# Altium PCB PCB1.PcbDoc (part 2 of 2)
Units mm, origin at the board's own origin, x right, y up, seen from the top; angles counter-clockwise.
Board outline 100 x 90 mm, 2 copper layers (Top Layer, Bottom Layer); 112 components, 100 nets, 469 pads, 191 vias.
Unrouted connection lines stored in the file: 2.
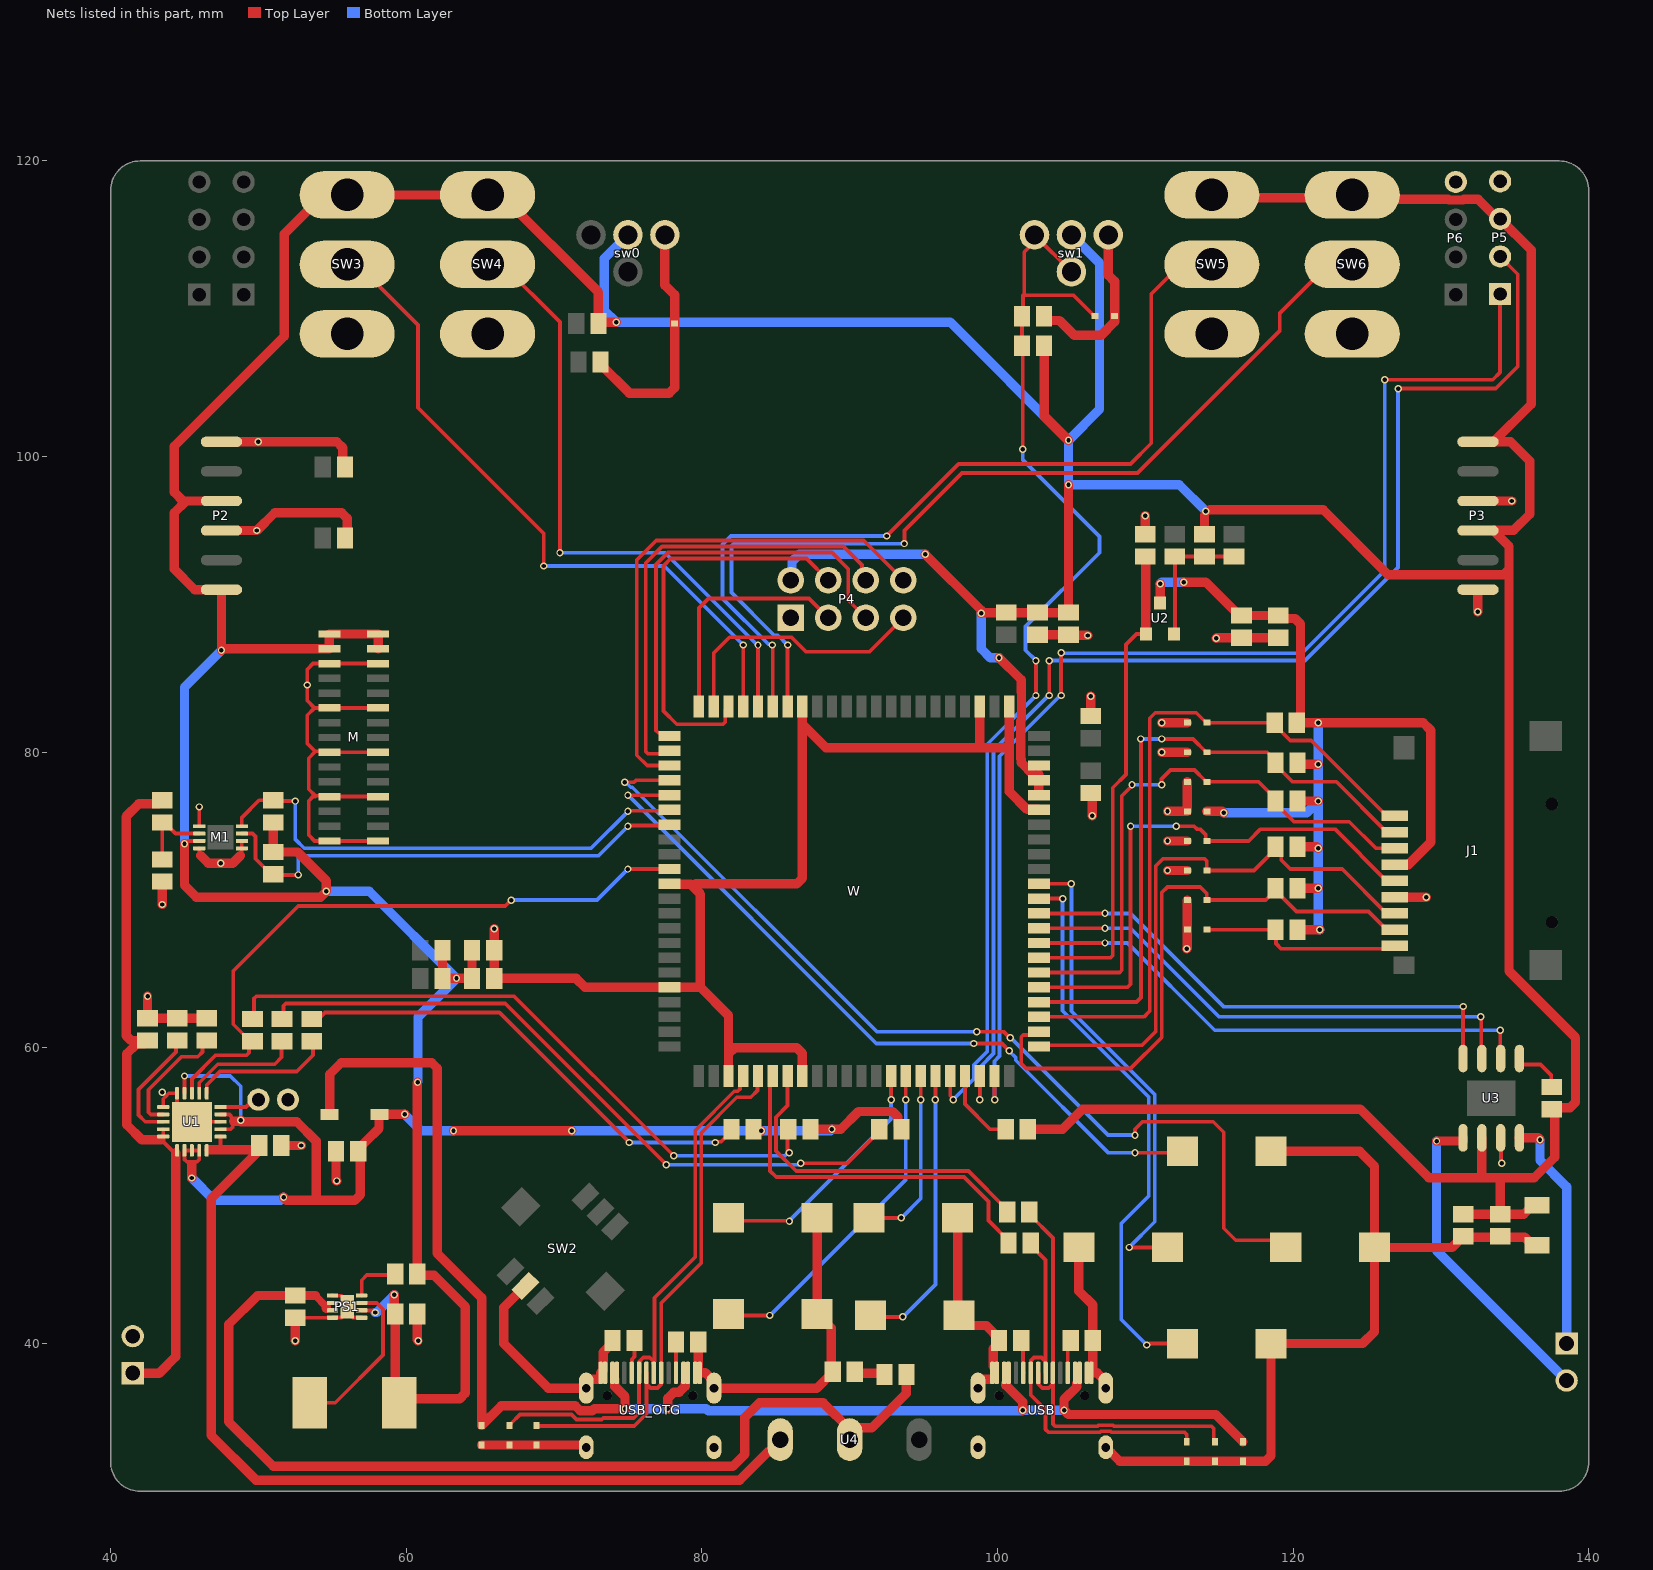
[diagram p2: the nets of this part, all layers, seen from the top]

## Via types
v1: diameter 0.5, hole 0.3, Top Layer to Bottom Layer, tented both sides, 187 vias
v2: diameter 3, hole 3, Top Layer to Bottom Layer, tented both sides, 4 vias

## Nets (pads, with @x,y where several pads share a name; then routed paths per layer and width w, separated by ;. In a path a pad name is that pad's centre, name@x,y a point inside that pad or via, vN(x,y) a via of type N, cw(c..) or ccw(c..) an arc to the next point about the centre after c; other vN are vias at no path point) (continued)
GND: C1.1 C2.1 C3.1 C4.1 C5.1 C6.2 C7.1 C8.1 C9.1 C10.1 C11.2 C12.1 C13.1 C14.2 C15.1 C16.1 C17.1 C18.1 C19.2 C20.2 C21.2 D1.2 D2.2 D3.2 D4.1 D5.1 D7.2 D8.2 D9.2 D13.2 D14.1 D15.1 D16.1 D17.1 D18.1 D19.1 D20.1 D21.1 J1.6 KEY1.2 KEY2.2 KEY3.2 KEY4.2 KEY5.2 KEY6.2 KEY7.2 KEY8.2 M1.1 M1.4 M1.5 M1.6 M.3 M.6 M.9 M.12 M.15 P1.2 P2.3 P2.6 P3.3 P3.6 P4.1 P5.4 P6.4 PS1.1 PS1.4 PS1.5 PS1.9 R3.1 R5.1 R9.1 R12.1 R16.2 R17.2 R25.1 RT1.2 sw0.1 sw1.1 SW2.2 SW3.3 SW4.3 SW5.3 SW6.3 U1.3 U1.10 U1.11 U1.21 U3.7 USB.1 USB.2 USB.3 USB.4 USB.A1 USB.A12 USB.B1 USB.B12 USB_OTG.1 USB_OTG.2 USB_OTG.3 USB_OTG.4 USB_OTG.A1 USB_OTG.A12 USB_OTG.B1 USB_OTG.B12 W.1 W.3 W.15 W.33 W.40 W.47 W.52 W.83 | length 360.6
  Top Layer w0.254: v1(43.5,57) 43.75,56.75 ; U1.11@43.565,56 43.565,56.565 43.75,56.75 ; M1.4@46,73.5 46,73.107 46.093,73.015 ; M1.1@46,75 v1(46,76.3) ; U1.3@47.435,55 U1.21@45.5,55 44.5,56 U1.10@44.5,56.935 43.935,56.935 43.75,56.75 ; 48.787,73.015 48.88,73.107 M1.5@48.88,73.5 M1.6@48.88,74 ; C13.1@52.5,41.75 PS1.4@55.015,41.75 55.028,41.763 55.613,41.763 PS1.9@56,42.15 ; 53.8,80 53.4,79.6 53.4,77.5 53.835,77.065 54.235,77.065 54.3,77 M.12@54.8,77 M.12@58.1,77 ; 53.835,77 53.7,77 53.4,76.7 53.4,74.4 53.8,74 M.15@58.1,74 ; PS1.1@55.015,43.25 55.028,43.237 55.613,43.237 56,42.85 PS1.9@56,42.5 PS1.9@56,42.15 ; PS1.5@56.985,41.75 56.972,41.763 56.387,41.763 PS1.9@56,42.15 ; M.9@58.1,80 M.9@54.8,80 54.3,80 54.235,80.065 53.835,80.065 53.3,80.6 53.3,82.5 53.8,83 ; M.6@58.1,83 M.6@54.8,83 53.8,83 ; M.3@58.1,86 M.3@54.8,86 53.7,86 53.3,85.6 53.3,83.5 53.8,83 ; U3.7@134.035,53.918 134.067,53.885 134.067,52.233 v1(134.1,52.2)
  Top Layer w0.635: v1(42.5,63.5) C14.2@42.5,62 R16.2@44.5,62 R17.2@46.5,62 ; v1(43.5,69.7) C6.2@43.5,71.25 ; 46.093,73.015 46.607,72.5 v1(47.44,72.5) 48.273,72.5 48.787,73.015 ; P2.3@47.5,95 v1(49.9,95) 51.1,96.2 55.628,96.2 56,95.828 56,94.65 C8.1@55.85,94.5 ; P2.6@47.5,101 v1(50,101) 55.3,101 55.717,100.583 55.717,99.532 C7.1@55.95,99.3 ; C11.2@51.55,53.4 v1(52.9,53.4) ; v1(52.5,40.2) C13.1@52.5,41.75 ; C5.1@55.25,53 55.25,51.05 v1(55.3,51) ; C12.1@60.75,42 60.75,40.25 v1(60.8,40.2) ; D1.2@65.1,33.14 D2.2@67,33.14 D3.2@68.8,33.14 72.015,33.14 USB_OTG.2@72.175,32.98 ; v1(65.95,68.067) C18.1@65.95,64.7 71.491,64.7 72.091,64.1 W.40@77.8,64.1 79.9,64.1 ; SW2.2@68.052,43.892 66.6,42.44 66.6,40 69.62,36.98 USB_OTG.3@72.175,36.98 72.175,37.419 72.344,37.587 72.982,37.587 73.15,37.755 USB_OTG.A1@73.15,38.02 73.317,38.187 73.317,39.418 73.95,40.05 R3.1@73.95,40.2 ; C3.1@73.15,106.4 73.15,106.25 75.1,104.3 77.788,104.3 78.16,104.672 D4.1@78.16,109 78.16,110.94 77.5,111.6 sw0.1@77.5,115 ; W.33@77.8,71.1 77.833,71.067 79.238,71.067 79.403,70.903 ; R5.1@79.75,40.1 79.75,38.12 USB_OTG.A12@79.85,38.02 80.236,38.02 80.825,37.431 USB_OTG.4@80.825,36.98 87.78,36.98 88.75,37.95 88.75,41.05 88.532,41.268 88.532,41.318 87.85,42 KEY1.2@87.8,42 KEY3.2@87.8,48.5 ; W.47@81.8,58.1 81.8,59.6 ; W.52@86.8,58.1 86.8,59.628 86.428,60 82.2,60 81.8,59.6 ; W.15@86.8,83.1 86.8,81.9 ; KEY4.2@97.3,48.5 97.3,42 KEY2.2@97.4,41.9 98.082,41.218 99.232,41.218 100.1,40.35 R9.1@100.1,40.2 100.1,40.05 99.7,39.65 USB.A1@99.7,38.453 ; USB.3@98.675,36.98 98.675,37.419 98.844,37.587 99.482,37.587 ; W.3@98.8,83.1 98.8,80.4 98.9,80.3 ; W.1@100.8,83.1 100.793,83.093 100.793,80.3 ; C1.1@102.7,87.95 C2.1@104.8,87.95 104.831,87.919 106.081,87.919 v1(106.1,87.9) ; W.83@102.8,76.1 102.767,76.133 102.003,76.133 100.793,77.343 100.793,80.229 100.793,80.3 ; C4.1@103.15,109.5 103.15,109.444 103.383,109.211 104.189,109.211 105.2,108.2 107,108.2 107.92,109.12 D5.1@107.92,109.5 107.92,111.855 107.5,112.275 sw1.1@107.5,115 ; KEY6.2@105.5,46.5 105.5,43.559 106.45,42.609 R12.1@106.45,40.2 106.45,38.12 USB.A12@106.35,38.02 106.736,38.02 107.325,37.431 USB.4@107.325,36.98 ; C10.1@106.3,77.25 106.4,77.15 v1(106.4,75.7) ; C9.1@106.3,82.45 v1(106.3,83.8) ; USB.1@107.325,32.98 107.325,32.779 107.494,32.61 107.695,32.61 108.265,32.04 D8.2@112.8,32.04 D9.2@114.7,32.04 D7.2@116.6,32.04 118.128,32.04 118.5,32.412 KEY8.2@118.5,40 124.7,40 125.5,40.8 KEY7.2@125.5,46.5 ; R25.1@110,94.75 v1(110,96) ; v1(111.1,80) D15.1@112.84,80 ; v1(111.1,82) D14.1@112.84,82 ; v1(111.5,72) D19.1@112.84,72 ; v1(111.5,74) D18.1@112.84,74 ; v1(111.5,76) D17.1@112.84,76 D16.1@112.84,78 ; v1(112.8,66.7) 112.84,66.74 D21.1@112.84,68 D20.1@112.84,70 ; v1(114.8,87.7) 114.85,87.75 C15.1@116.5,87.75 C16.1@119,87.75 ; KEY5.2@118.5,53 124.5,53 125.5,52 KEY7.2@125.5,46.5 ; J1.6@126.873,70.2 v1(129,70.2) ; C21.2@131.5,47.2 135.65,47.2 136.2,46.65 C19.2@136.5,46.65 ; C21.2@131.5,47.25 131.35,47.25 131.118,47.017 131.118,46.872 130.746,46.5 KEY7.2@125.5,46.5 ; v1(132.5,89.5) P3.6@132.5,91 ; P3.3@132.5,97 v1(134.8,97) ; 79.403,70.903 79.6,71.1 86.428,71.1 86.8,71.472 86.8,81.9 ; 79.403,70.903 79.9,70.406 79.9,64.1 ; 79.9,64.1 81.8,62.2 81.8,59.6 ; 86.8,81.9 88.4,80.3 98.9,80.3 ; 98.9,80.3 100.793,80.3
  other v1: 53.3,84.55
KEY_A: KEY7.1 W.26 | length 65.9
  Top Layer w0.254: v1(74.776,77.976) 75.409,77.976 75.534,78.1 W.26@77.8,78.1 ; v1(98.6,61.1) 100.405,61.1 100.805,60.7 v1(100.872,60.7) ; v1(109.3,54.1) 109.3,54.5 109.8,55 114.6,55 115.3,54.3 115.3,47.8 116.118,46.982 119.018,46.982 KEY7.1@119.5,46.5 KEY7.1@119.3,46.3
  Bottom Layer w0.254: v1(74.776,77.976) 74.842,77.976 75.188,77.629 75.296,77.629 91.825,61.1 v1(98.6,61.1) ; v1(100.872,60.7) 107.472,54.1 v1(109.3,54.1)
KEY_B: KEY5.1 W.27 | length 50.5
  Top Layer w0.254: v1(75,77.1) W.27@77.8,77.1 ; v1(98.4,60.3) 100.3,60.3 v1(100.8,59.8) ; v1(109.3,52.9) 112.4,52.9 KEY5.1@112.5,53
  Bottom Layer w0.254: v1(75,77.1) 91.8,60.3 v1(98.4,60.3) ; v1(100.8,59.8) 100.8,59.78 101.236,59.344 101.236,59.164 107.5,52.9 v1(109.3,52.9)
KEY_MENU: KEY4.1 W.60 | length 12.3
  Top Layer w0.254: KEY4.1@91.3,48.5 v1(93.5,48.5) ; v1(94.8,56.5) W.60@94.8,58.1
  Bottom Layer w0.254: v1(93.5,48.5) 94.8,49.8 v1(94.8,56.5)
KEY_OPTION: KEY3.1 W.58 | length 16.9
  Top Layer w0.254: KEY3.1@81.8,48.5 82,48.3 85.9,48.3 v1(85.924,48.276) ; v1(92.8,56.5) W.58@92.8,58.1
  Bottom Layer w0.254: v1(85.924,48.276) 85.924,48.324 92.8,55.2 v1(92.8,56.5)
KEY_SELECT: KEY1.1 W.59 | length 22.9
  Top Layer w0.254: KEY1.1@81.8,42 81.9,41.9 v1(84.6,41.9) ; v1(93.8,56.5) W.59@93.8,58.1
  Bottom Layer w0.254: v1(84.6,41.9) 93.8,51.1 v1(93.8,56.5)
KEY_START: KEY2.1 W.61 | length 19.5
  Top Layer w0.254: KEY2.1@91.4,41.9 91.5,41.8 v1(93.6,41.8) ; v1(95.8,56.5) W.61@95.8,58.1
  Bottom Layer w0.254: v1(93.6,41.8) 95.8,44 v1(95.8,56.5)
KEY_X: KEY6.1 W.78 | length 32.5
  Top Layer w0.254: W.78@102.8,71.1 v1(105,71.1) ; v1(108.9,46.5) KEY6.1@111.5,46.5
  Bottom Layer w0.254: v1(105,71.1) 105,62.486 110.636,56.85 110.636,48.236 v1(108.9,46.5)
KEY_Y: KEY8.1 W.77 | length 38.1
  Top Layer w0.254: W.77@102.8,70.1 v1(104.4,70.1) ; v1(110.1,39.9) 110.167,39.9 110.267,40 KEY8.1@112.5,40
  Bottom Layer w0.254: v1(104.4,70.1) 104.4,62.511 110.229,56.682 110.229,49.973 108.371,48.114 108.371,41.629 v1(110.1,39.9)
MAX_SCL: M1.7 R11.1 W.29 | length 33
  Top Layer w0.254: M1.7@48.88,74.5 49.6,74.5 49.8,74.3 49.8,72.8 50.85,71.75 R11.1@51,71.75 51.05,71.7 v1(52.7,71.7) ; v1(75,75) 75.047,75.047 77.747,75.047 W.29@77.8,75.1
  Bottom Layer w0.254: v1(52.7,71.7) 52.7,72.851 52.849,73 73,73 v1(75,75)
MAX_SDA: M1.8 R8.1 W.28 | length 33.9
  Top Layer w0.254: M1.8@48.88,75 48.88,75.58 50.05,76.75 R8.1@51,76.75 51.05,76.7 v1(52.5,76.7) ; v1(75,76) 75.047,76.047 77.747,76.047 W.28@77.8,76.1
  Bottom Layer w0.254: v1(52.5,76.7) 52.5,74.1 53.1,73.5 72.5,73.5 v1(75,76)
NetC6_1: C6.1 M1.2 R10.2 | length 5.3
  Top Layer w0.254: C6.1@43.5,72.75 R10.2@43.5,75.25 43.65,75.25 44.4,74.5 M1.2@46,74.5
NetD10_2: D10.2 R13.1 | length 32.6
  Top Layer w0.254: R13.1@53.8,61.7 54.5,62.4 66.3,62.4 v1(75.1,53.6) ; v1(80.9,53.6) 80.947,53.647 81.297,53.647 82,54.35 D10.2@82,54.5
  Bottom Layer w0.254: v1(75.1,53.6) v1(80.9,53.6)
NetD11_2: D11.2 R15.1 | length 43.9
  Top Layer w0.254: R15.1@49.7,61.897 49.7,63.351 49.849,63.5 67.3,63.5 v1(78.1,52.7) ; D11.2@85.85,54.5 85.8,54.45 85.8,53.067 85.9,52.967 v1(85.9,52.9)
  Bottom Layer w0.254: v1(78.1,52.7) 85.633,52.7 85.833,52.9 v1(85.9,52.9)
NetD12_2: D12.2 R18.1 | length 47.1
  Top Layer w0.254: R18.1@51.7,61.735 51.7,62.851 51.849,63 66.7,63 v1(77.6,52.1) ; v1(86.7,52.2) 89.85,52.2 92,54.35 D12.2@92,54.5
  Bottom Layer w0.254: v1(77.6,52.1) 86.533,52.1 86.633,52.2 v1(86.7,52.2)
NetD13_1: D13.1 R33.2 | length 2.2
  Top Layer w0.635: D13.1@90.25,38.1 90.35,38 92.25,38 R33.2@92.35,37.9
NetD21_2: D21.2 J1.9 R24.2 | length 13.9
  Top Layer w0.254: D21.2@114.16,68 R24.2@118.8,68 118.832,67.968 118.832,67.068 119.2,66.7 126.673,66.7 J1.9@126.873,66.9
NetL1_1: L1.1 PS1.7 | length 11
  Top Layer w0.254: L1.1@53.475,36 55.2,36 58.421,39.221 58.421,42.319 58.003,42.737 56.998,42.737 PS1.7@56.985,42.75
NetPS1_8: PS1.8 R14.2 | length 3.1
  Top Layer w0.254: PS1.8@56.985,43.25 56.985,44.285 57.332,44.632 58.827,44.632 58.895,44.7 R14.2@58.928,44.7
NetR3_2: R3.2 USB_OTG.A5 | length 2.3
  Top Layer w0.254: USB_OTG.A5@75.25,38.02 75.273,38.043 75.273,38.942 75.45,39.119 R3.2@75.45,40.2
NetR4_1: R4.1 W.63 | length 5.4
  Top Layer w0.254: W.63@97.8,58.1 97.8,56.2 99.5,54.5 R4.1@100.55,54.5
NetR5_2: R5.2 USB_OTG.B5 | length 2.1
  Top Layer w0.254: USB_OTG.B5@78.25,38.02 R5.2@78.25,40.1
NetR6_2: R6.2 W.51 | length 22.8
  Top Layer w0.254: W.51@85.8,58.1 85.8,56.095 85.021,55.316 85.021,53.031 86.381,51.671 98.029,51.671 100.65,49.05 R6.2@100.65,48.9
NetR7_2: R7.2 W.50 | length 25.5
  Top Layer w0.254: W.50@84.8,58.1 84.614,57.914 84.614,51.68 85.03,51.264 97.736,51.264 99.386,49.614 99.386,48.314 100.75,46.95 R7.2@100.75,46.8
NetR9_2: R9.2 USB.A5 | length 2.2
  Top Layer w0.254: R9.2@101.6,40.2 101.727,40.073 101.727,38.043 USB.A5@101.75,38.02
NetR12_2: R12.2 USB.B5 | length 2.4
  Top Layer w0.254: USB.B5@104.75,38.02 104.75,39.55 105.25,40.05 R12.2@105.25,40.2
NetR13_2: R13.2 U1.6 | length 9.3
  Top Layer w0.254: U1.6@46.5,56.935 46.5,57.5 47.4,58.4 52.6,58.4 53.7,59.5 R13.2@53.7,60.2
NetR16_1: R16.1 U1.13 | length 8
  Top Layer w0.254: U1.13@43.565,55 43.562,55.003 42.349,55.003 41.896,55.456 41.896,57.196 44.418,59.718 44.418,60.418 R16.1@44.5,60.5
NetR17_1: R17.1 U1.12 | length 8.2
  Top Layer w0.254: U1.12@43.565,55.5 42.711,55.5 42.563,55.649 42.563,57.163 44.8,59.4 45.9,59.4 46.218,59.718 46.218,60.218 R17.1@46.5,60.5
NetR18_2: R18.2 U1.7 | length 8.1
  Top Layer w0.254: U1.7@46,56.935 46,57.649 47.251,58.9 51.1,58.9 51.568,59.368 51.568,60.418 R18.2@51.6,60.45
NetR26_1: R26.1 R31.1 R32.1 U2.2 | length 9.3
  Top Layer w0.254: U2.2@111.95,88 112,88.05 R31.1@112,93.25 R32.1@114,93.25 R26.1@116,93.25
NetR27_2: R27.2 U3.1 | length 3.6
  Top Layer w0.254: U3.1@135.305,59.282 135.305,59.046 135.479,58.873 136.727,58.873 137.468,58.132 137.468,57.382 R27.2@137.5,57.35
NetRT1_1: RT1.1 U1.5 | length 2.8
  Top Layer w0.254: U1.5@47.435,56 49.163,56 49.663,56.5 RT1.1@50,56.5
NRF_CE: P4.3 W.22 | length 16.2
  Top Layer w0.254: W.22@79.8,83.1 79.8,89.751 80.449,90.4 87.247,90.4 P4.3@88.55,89.097
NRF_CLK: P4.5 W.23 | length 29.9
  Top Layer w0.254: W.23@77.8,81.1 77.577,81.323 77.049,81.323 76.9,81.472 76.9,92.7 77.706,93.506 88.794,93.506 89.9,92.4 89.9,90.287 P4.5@91.09,89.097
NRF_CS: P4.4 W.20 | length 27.5
  Top Layer w0.254: W.20@81.8,83.1 81.577,82.877 81.577,82.049 81.428,81.9 78.3,81.9 77.4,82.8 77.4,92.6 77.9,93.1 87.087,93.1 P4.4@88.55,91.637
NRF_IRQ: P4.8 W.25 | length 35.4
  Top Layer w0.254: W.25@77.8,79.1 76.3,79.1 75.6,79.8 75.6,93 76.919,94.319 90.948,94.319 P4.8@93.63,91.637
NRF_MISO: P4.7 W.21 | length 18.2
  Top Layer w0.254: W.21@80.8,83.1 80.8,86.707 81.878,87.784 86.061,87.784 87.043,86.803 91.337,86.803 P4.7@93.63,89.097
NRF_MOSI: P4.6 W.24 | length 31.2
  Top Layer w0.254: W.24@77.8,80.1 77.6,79.9 76.349,79.9 76.2,80.049 76.2,92.8 77.313,93.913 89.587,93.913 90.825,92.675 90.825,91.903 P4.6@91.09,91.637
NS_BCLK: U3.3 W.75 | length 35.2
  Top Layer w0.254: W.75@102.8,68.1 v1(107.271,68.1) ; v1(132.7,62.1) 132.732,62.068 132.732,59.315 U3.3@132.765,59.282
  Bottom Layer w0.254: v1(107.271,68.1) 109,68.1 115,62.1 v1(132.7,62.1)
NS_LRCLK: U3.2 W.74 | length 35.6
  Top Layer w0.254: W.74@102.8,67.1 v1(107.271,67.1) ; v1(134,61.2) 134.017,61.183 134.017,59.3 U3.2@134.035,59.282
  Bottom Layer w0.254: v1(107.271,67.1) 108.8,67.1 114.7,61.2 v1(134,61.2)
NS_SDATA: U3.4 W.76 | length 34.8
  Top Layer w0.254: W.76@102.8,69.1 v1(107.271,69.1) ; U3.4@131.495,59.282 131.497,59.285 131.497,62.797 v1(131.5,62.8)
  Bottom Layer w0.254: v1(107.271,69.1) 109,69.1 115.323,62.777 131.477,62.777 v1(131.5,62.8)
P4_BOOT: C4.2 D5.2 R2.1 sw1.2 sw1.3 W.62 | length 76.4
  Top Layer w0.254: W.62@96.8,58.1 96.8,56.767 97,56.567 v1(97,56.5) ; v1(101.7,100.5) 101.7,107.45 R2.1@101.65,107.5 C4.2@101.65,109.5 101.732,109.582 101.732,110.917 ; v1(102.6,83.841) v1(102.6,86.2) ; sw1.3@105,112.5 sw1.2@102.5,115 102.5,114.528 101.805,113.833 101.805,110.99 101.732,110.917 ; D5.2@106.6,109.5 106.56,109.5 105.143,110.917 101.732,110.917
  Bottom Layer w0.254: v1(97,56.5) 98.394,57.894 98.394,58.845 99.3,59.751 99.3,80.541 v1(102.6,83.841) ; v1(101.7,100.5) 101.7,99.8 106.9,94.6 106.9,93.5 101.9,88.5 101.9,86.9 v1(102.6,86.2)
P4_UART_RX: P5.1 W.65 | length 84.2
  Top Layer w0.254: v1(99.8,56.5) W.65@99.8,58.1 ; v1(104.3,83.841) v1(104.3,86.729) ; v1(126.2,105.2) 133.5,105.2 134,105.7 P5.1@134,111
  Bottom Layer w0.254: v1(99.8,56.5) 99.8,59.102 100.142,59.444 100.142,79.735 104.249,83.841 v1(104.3,83.841) ; v1(104.3,86.729) 104.329,86.7 120.6,86.7 126.2,92.3 v1(126.2,105.2)
P4_UART_TX: P5.2 W.64 | length 88.2
  Top Layer w0.254: v1(98.8,56.5) W.64@98.8,58.1 ; v1(103.5,83.841) v1(103.5,86.2) ; v1(127.1,104.6) 133.7,104.6 135.2,106.1 135.2,112.34 P5.2@134,113.54
  Bottom Layer w0.254: v1(98.8,56.5) 98.8,58.677 99.736,59.612 99.736,80.136 103.441,83.841 v1(103.5,83.841) ; v1(103.5,86.2) 120.8,86.2 127.1,92.5 v1(127.1,104.6)
POW_STATUS: R15.2 U1.8 W.32 | length 44.2
  Top Layer w0.254: U1.8@45.5,56.935 45.503,56.938 45.503,57.903 47.1,59.5 49.2,59.5 49.368,59.668 49.368,60.218 R15.2@49.6,60.45 49.45,60.45 48.3,61.6 48.3,65.2 52.7,69.6 66.7,69.6 v1(67.1,70) ; v1(75,72.1) W.32@77.8,72.1
  Bottom Layer w0.254: v1(67.1,70) 72.9,70 v1(75,72.1)
SD_CLK: D18.2 J1.5 W.71 | length 37.3
  Top Layer w0.254: W.71@102.8,64.1 108.8,64.1 109,64.3 v1(109,75) ; v1(112.1,75) 113.289,75 113.489,74.8 113.7,74.8 114.095,74.405 114.095,74.065 D18.2@114.16,74 117,74 117.8,74.8 122.823,74.8 126.323,71.3 J1.5@126.873,71.3
  Bottom Layer w0.254: v1(109,75) v1(112.1,75)
SD_CMD: D16.2 J1.3 R21.2 W.72 | length 39.3
  Top Layer w0.254: W.72@102.8,65.1 108.251,65.1 108.4,65.249 108.4,77.033 109.1,77.733 v1(109.1,77.8) ; v1(111.1,77.8) 111.1,78.2 111.7,78.8 113.32,78.8 114.047,78.073 114.087,78.073 D16.2@114.16,78 117.65,78 118.8,76.85 R21.2@118.8,76.7 118.8,76.55 120.05,75.3 123.8,75.3 125.6,73.5 J1.3@126.873,73.5
  Bottom Layer w0.254: v1(109.1,77.8) v1(111.1,77.8)
SD_D0: D19.2 J1.7 R22.2 W.67 | length 39.4
  Top Layer w0.254: W.67@102.8,60.1 102.882,60.182 109.782,60.182 110.706,61.106 110.706,72.306 111.2,72.8 114,72.8 114.16,72.64 D19.2@114.16,72 117.35,72 R22.2@118.8,73.45 ; R22.2@118.8,73.6 R22.2@118.8,73.45 ; J1.7@126.873,69.1 126.323,69.1 123.323,72.1 119.8,72.1 119.19,72.71 119.19,73.06 R22.2@118.8,73.45
SD_D1: D20.2 J1.8 R23.2 W.68 | length 41.5
  Top Layer w0.254: W.68@102.8,61.1 102.577,60.877 101.749,60.877 101.6,60.728 101.6,58.949 101.949,58.6 109,58.6 111.113,60.713 111.113,70.513 111.489,70.889 113.711,70.889 114.16,70.44 D20.2@114.16,70 118.15,70 R23.2@118.8,70.65 ; R23.2@118.8,70.8 R23.2@118.8,70.65 ; J1.8@126.873,68 126.323,68 125.098,69.225 120.225,69.225 R23.2@118.8,70.65
SD_D2: D14.2 J1.1 R19.2 W.69 | length 47.2
  Top Layer w0.254: W.69@102.8,62.1 109.9,62.1 110.3,62.5 110.3,82.3 110.671,82.671 113.449,82.671 114.12,82 R19.2@118.75,82 118.75,81.85 119.8,80.8 121.223,80.8 126.323,75.7 J1.1@126.873,75.7
SD_D3: D15.2 J1.2 R20.2 W.70 | length 44.5
  Top Layer w0.254: W.70@102.8,63.1 109.4,63.1 109.7,63.4 v1(109.7,80.9) ; v1(111.1,80.9) 113.22,80.9 114.12,80 118.25,80 118.8,79.45 R20.2@118.8,79.3 118.8,79.15 119.95,78 122.923,78 126.323,74.6 J1.2@126.873,74.6
  Bottom Layer w0.254: v1(109.7,80.9) v1(111.1,80.9)
SD_PWR: R25.2 U2.1 W.73 | length 33.4
  Top Layer w0.254: W.73@102.8,66.1 107.651,66.1 107.8,66.249 107.8,77.6 108.7,78.5 108.7,87.3 109.4,88 U2.1@110.05,88
  Top Layer w0.635: R25.2@110,93.25 110.025,93.225 110.025,88.025 U2.1@110.05,88
SD_VDD: C15.2 C16.2 D17.2 J1.4 R19.1 R20.1 R21.1 R22.1 R23.1 R24.1 U2.3 | length 67.8
  Top Layer w0.635: U2.3@111,90.1 v1(111,91.4) ; v1(112.6,91.5) 114.1,91.5 116.35,89.25 C15.2@116.5,89.25 C16.2@119,89.25 119.199,89.051 120.128,89.051 120.5,88.679 120.5,82.4 120.25,82.15 R19.1@120.25,82 v1(121.7,82) 128.8,82 129.3,81.5 129.3,73.9 127.8,72.4 J1.4@126.873,72.4 ; D17.2@114.16,76 115.2,76 v1(115.3,75.9) ; R24.1@120.3,68 v1(121.8,68) ; R23.1@120.3,70.8 v1(121.7,70.8) ; R22.1@120.3,73.6 121.6,73.6 v1(121.7,73.5) ; R21.1@120.3,76.7 v1(121.7,76.7) ; R20.1@120.3,79.3 120.4,79.2 v1(121.7,79.2)
  Bottom Layer w0.635: v1(111,91.4) 111.1,91.5 v1(112.6,91.5) ; v1(115.3,75.9) 120.9,75.9 v1(121.7,76.7) ; v1(121.7,82) v1(121.7,79.2) v1(121.7,76.7) ; v1(121.8,68) 121.7,68.1 v1(121.7,70.8) v1(121.7,73.5) v1(121.7,76.7)
SG1: SW3.2 W.19 | length 46.2
  Top Layer w0.254: SW3.2@56,113 56.7,113 60.8,108.9 60.8,103.3 69.3,94.8 v1(69.3,92.6) ; W.19@82.8,83.1 v1(82.8,87.255)
  Bottom Layer w0.254: v1(69.3,92.6) 77.455,92.6 v1(82.8,87.255)
SG2: SW4.2 W.18 | length 42.3
  Top Layer w0.254: SW4.2@65.5,113 66.5,113 70.4,109.1 v1(70.4,93.5) ; v1(83.798,87.253) 83.799,87.252 W.18@83.8,83.1 W.18@83.8,83.1
  Bottom Layer w0.254: v1(70.4,93.5) 77.5,93.5 83.747,87.253 v1(83.798,87.253)
SG3: SW5.2 W.17 | length 59.3
  Top Layer w0.254: v1(84.758,87.255) 84.8,87.213 W.17@84.8,83.1 ; v1(92.5,94.629) 97.371,99.5 109,99.5 110.4,100.9 110.4,111.001 112.399,113 SW5.2@114.5,113
  Bottom Layer w0.254: v1(84.758,87.255) 84.711,87.302 84.498,87.302 81.4,90.4 81.4,94.051 81.978,94.629 v1(92.5,94.629)
SG4: SW6.2 W.16 | length 63.7
  Top Layer w0.254: W.16@85.8,83.1 v1(85.8,87.255) ; v1(93.7,94.12) 93.7,95 97.6,98.9 109.474,98.9 119.1,108.526 119.1,109.708 122.392,113 SW6.2@124,113
  Bottom Layer w0.254: v1(85.8,87.255) 85.137,87.918 84.882,87.918 82,90.8 82,93.951 82.149,94.1 93.68,94.1 v1(93.7,94.12)
USB_DM: D2.1 USB_OTG.A7 USB_OTG.B7 W.48 | length 36.1
  Top Layer w0.254: D2.1@67,34.46 67.073,34.533 67.073,34.573 67.7,35.2 71.189,35.2 71.526,34.863 73.233,34.863 73.338,34.968 75.394,34.968 75.75,35.324 USB_OTG.B7@75.75,38.02 75.773,38.043 75.773,38.794 76.028,39.049 76.472,39.049 76.679,38.842 ; USB_OTG.A7@76.692,38.692 76.761,38.761 76.8,38.8 76.8,38.842 76.8,43.1 79.546,45.846 79.546,54.421 82.196,57.071 82.428,57.071 82.577,57.219 82.577,57.877 W.48@82.8,58.1
USB_DM_OTG: D8.1 R7.1 USB.A7 USB.B7 | length 25.6
  Top Layer w0.254: R7.1@102.25,46.8 102.25,46.65 103.25,45.65 103.25,38.82 USB.A7@103.25,38.02 ; 103.179,38.842 102.972,39.049 102.474,39.049 102.273,38.848 102.273,38.043 USB.B7@102.25,38.02 102.25,36.52 103.245,35.526 103.245,34.195 103.446,33.994 106.936,33.994 107.002,34.059 107.648,34.059 107.714,33.994 112.651,33.994 112.8,33.845 D8.1@112.8,33.36
USB_DP: D3.1 USB_OTG.A6 USB_OTG.B6 W.49 | length 35.8
  Top Layer w0.254: D3.1@68.8,34.46 68.84,34.42 75.421,34.42 76.25,35.249 76.25,37.22 ; 76.25,37.254 USB_OTG.A6@76.25,38.02 ; 76.321,37.198 76.528,36.991 76.991,36.991 77.227,37.227 77.227,37.997 USB_OTG.B6@77.25,38.02 77.25,42.75 79.952,45.452 79.952,54.252 82.364,56.664 83.309,56.664 83.763,57.118 83.763,58.063 W.49@83.8,58.1
USB_DP_OTG: D9.1 R6.1 USB.A6 USB.B6 | length 28.9
  Top Layer w0.254: R6.1@102.15,48.9 102.15,48.75 103.75,47.15 USB.B6@103.75,38.02 103.75,37.42 103.727,37.397 103.727,37.246 103.472,36.991 103.028,36.991 102.773,37.246 102.773,37.997 USB.A6@102.75,38.02 ; 103.75,37.198 103.75,34.549 103.899,34.4 106.768,34.4 106.834,34.466 107.816,34.466 107.882,34.4 114.478,34.4 114.627,34.251 114.627,33.433 D9.1@114.7,33.36
VBUS: D1.1 D6.A D7.1 USB.A4 USB.A9 USB.B4 USB.B9 USB_OTG.A4 USB_OTG.A9 USB_OTG.B4 USB_OTG.B9 | length 98.2
  Top Layer w0.635: D6.A@54.82,55.5 54.82,58.22 55.6,59 61.728,59 62.1,58.628 62.1,46.1 65.1,43.1 D1.1@65.1,34.46 66.437,35.797 71.436,35.797 71.773,35.46 72.577,35.46 72.717,35.6 v1(74.8,35.6) 74.8,36.414 74.117,37.097 USB_OTG.B9@74.117,37.587 ; v1(77.7,35.6) 77.7,36.3 78.11,36.71 78.46,36.71 78.87,37.119 USB_OTG.B4@78.87,37.303 ; USB.A4@100.57,37.327 100.57,37.179 101.7,36.049 v1(101.7,35.5) ; USB.B4@105.37,37.3 105.37,37.084 104.5,36.214 v1(104.5,35.5) 104.8,35.2 114.76,35.2 D7.1@116.6,33.36
  Bottom Layer w0.635: v1(74.8,35.6) v1(77.7,35.6) 80.283,35.6 80.423,35.46 101.66,35.46 v1(101.7,35.5) v1(104.5,35.5)
VCC3.3: C1.2 C2.2 C12.2 C17.2 C18.2 C19.1 C20.1 C21.1 L1.2 M1.3 M.1 M.2 P2.1 P2.4 P3.1 P3.4 P4.2 P5.3 PS1.6 R1.2 R2.2 R4.2 R8.2 R11.2 R14.1 R27.1 R28.2 R29.2 R30.2 R32.2 sw0.4 sw1.4 SW3.1 SW4.1 SW5.1 SW6.1 U3.6 W.84 W.85 W.86 | length 464.7
  Top Layer w0.254: v1(45,73.8) 45.062,73.8 45.262,74 M1.3@46,74 ; PS1.6@56.985,42.25 56.998,42.237 57.688,42.237 57.825,42.1 v1(57.891,42.1) ; C12.2@59.2,41.9 C12.2@59.25,41.85
  Top Layer w0.635: 44.9,97 44.3,97.6 44.3,100.7 51.749,108.149 51.749,115.057 54.392,117.7 SW3.1@56,117.7 SW4.1@65.5,117.7 66.432,117.7 73,111.132 R1.2@73,109 73.1,109.1 v1(74.2,109.1) ; v1(45,73.8) 45,71 45.803,70.197 54.2,70.197 v1(54.6,70.597) 54.6,71.3 52.65,73.25 R11.2@51,73.25 R8.2@51,75.25 ; P2.4@47.5,97 45.1,97 44.3,96.2 44.3,92.4 45.7,91 P2.1@47.5,91 v1(47.5,86.9) 47.6,87 M.2@54.8,87 M.1@54.8,88 ; M.1@54.8,88 M.1@58.1,88 M.2@58.1,87 ; C12.2@59.2,41.9 v1(59.2,43.3) ; C12.2@59.25,41.85 59.25,36.275 L1.2@59.525,36 ; L1.2@59.525,36.275 63.628,36.275 64,36.647 64,42.5 61.881,44.619 60.831,44.619 R14.1@60.75,44.7 60.75,57.65 v1(60.765,57.665) ; R29.2@62.45,66.6 R30.2@62.45,64.7 v1(63.4,64.7) C18.2@64.45,64.7 C17.2@64.45,66.6 ; v1(95.1,93.4) 98.9,89.6 v1(98.9,89.4) 98.95,89.45 R28.2@100.6,89.45 C1.2@102.7,89.45 C2.2@104.8,89.45 v1(104.8,98.1) ; v1(100.1,86.4) 101.6,84.9 101.6,84.065 101.62,84.045 101.62,82.155 101.58,82.116 101.58,80.555 101.58,79.555 101.6,79.535 101.6,79.3 102.4,78.5 ; R4.2@102.05,54.5 104.4,54.5 105.75,55.85 124.55,55.85 129.185,51.215 132.785,51.215 ; W.84@102.8,77.1 W.85@102.8,78.1 102.8,78.5 ; R2.2@103.15,107.5 103.15,102.75 v1(104.8,101.1) ; R32.2@114,94.75 114,96.028 ; 114.372,96.4 122.036,96.4 126.436,92 134.228,92 134.6,92.372 ; SW5.1@114.5,117.7 114.7,117.5 123.8,117.5 SW6.1@124,117.7 124.3,117.4 130.489,117.4 130.529,117.36 131.505,117.36 131.545,117.4 132.527,117.4 133.847,116.08 P5.3@134,116.08 136.1,113.98 136.1,103.55 P3.1@133.55,101 ; C21.1@131.5,48.75 C20.1@134,48.75 134,51.215 ; P3.4@132.5,95 133.532,95 134.6,93.932 134.6,92.372 ; P3.1@132.5,101 P3.1@133.55,101 ; U3.6@132.765,53.918 132.765,51.235 132.785,51.215 ; P3.4@133.568,95 133.58,95.012 134.912,95.012 136,96.1 136,99.7 134.7,101 P3.1@133.55,101 ; C20.1@134.15,48.75 135.6,48.75 136.2,49.35 C19.1@136.5,49.35 ; R27.1@137.5,55.85 137.599,55.949 138.728,55.949 139.1,56.321 139.1,60.7 134.6,65.2 134.6,92.372 ; R27.1@137.7,55.9 137.7,52.6 136.315,51.215 134,51.215 ; 132.785,51.215 134,51.215
  Bottom Layer w0.635: v1(45,73.8) 45,84.4 v1(47.5,86.9) ; v1(54.6,70.597) 57.503,70.597 v1(63.4,64.7) 60.8,62.1 60.8,57.7 v1(60.765,57.665) ; v1(57.891,42.1) 58,42.1 v1(59.2,43.3) ; sw0.4@75,115 73.4,113.4 73.4,109.9 v1(74.2,109.1) 96.8,109.1 v1(104.8,101.1) ; P4.2@86.01,91.637 86.099,91.725 86.099,92.899 86.6,93.4 v1(95.1,93.4) ; v1(98.9,89.4) 98.9,87 99.5,86.4 v1(100.1,86.4) ; sw1.4@105,115 106.9,113.1 106.9,103.2 v1(104.8,101.1) ; v1(114.1,96.3) 112.3,98.1 v1(104.8,98.1) v1(104.8,101.1)
VCC5: C5.2 D6.C D10.1 D11.1 D12.1 U1.2 U1.4 U1.9 U1.17 U1.18 U1.19 | length 82.1
  Top Layer w0.254: U1.9@45,56.935 v1(45,58.1) ; U1.2@47.435,54.5 47.438,54.503 48.124,54.503 48.198,54.577 48.273,54.652 48.273,55.03 48.325,55.03 48.318,55.03 48.286,55.063 48.24,55.108 48.179,55.313 ccw(c47.935,55.243) 48.178,55.316 48.16,55.375 48.117,55.419 ccw(c47.935,55.243) 48.112,55.425 48.04,55.495 48.011,55.497 47.438,55.497 U1.4@47.435,55.5 ; 45,52.449 45.149,52.3 45.854,52.3 46.003,52.449 46.003,53.062 U1.19@46,53.065 U1.18@45.5,53.065 U1.17@45,53.065 45,52.449
  Top Layer w0.635: v1(45.5,51.2) 45.5,52.1 ; 48.325,55.03 48.73,55.03 v1(48.8,55.1) ; v1@48.8,55 52.6,55 53.9,53.7 53.9,49.7 ; v1(51.7,49.9) 51.9,49.7 53.9,49.7 ; v1(59.9,55.5) D6.C@58.18,55.5 58.154,55.474 58.154,54.554 57.3,53.7 56.75,53.15 C5.2@56.75,53 56.9,52.85 56.9,50.072 56.528,49.7 53.9,49.7 ; v1(63.2,54.4) v1(71.2,54.4) ; D10.1@83.5,54.5 83.6,54.4 v1(84.017,54.4) ; D11.1@87.35,54.5 89.4,54.5 90.6,55.7 92.896,55.7 93.267,55.328 93.267,54.733 D12.1@93.5,54.5
  Bottom Layer w0.254: v1(45,58.1) 48.1,58.1 48.8,57.4 v1(48.8,55.1)
  Bottom Layer w0.635: v1(45.5,51.2) 47,49.7 51.5,49.7 v1(51.7,49.9) ; v1(59.9,55.5) 61,54.4 v1(63.2,54.4) ; v1(71.2,54.4) 84.174,54.4 88.7,54.4 v1(88.8,54.5)
VCC_BAT: C14.1 P1.1 R10.1 U1.14 U1.15 U1.16 | length 47.6
  Top Layer w0.254: 43.41,53.8 44.355,52.855 ; U1.15@43.565,54 U1.14@43.565,54.5
  Top Layer w0.635: P1.1@41.5,38 43.3,38 44.4,39.1 U1.16@44.4,52.9 ; 43.41,53.8 42.1,53.8 41.1,54.8 41.1,59.6 41.768,60.268 42.267,60.268 C14.1@42.5,60.5 41.382,60.5 41.05,60.833 41.05,75.65 41.917,76.517 43.268,76.517 R10.1@43.5,76.75
VCC_M_OUT: C11.1 U1.1 U1.20 U4.3 | length 66.3
  Top Layer w0.254: 47.435,53.1 U1.1@47.435,54 ; C11.1@49.75,53.1 C11.1@50.05,53.4
  Top Layer w0.635: 46.688,53.1 47.435,53.1 C11.1@49.75,53.1 ; C11.1@50.2,53.2 49.925,52.925 46.8,49.8 46.8,33.8 49.835,30.765 82.565,30.765 84.496,32.696 84.808,32.696 85.3,33.188 U4.3@85.3,33.5
VCC_PWR: C13.2 PS1.2 PS1.3 R33.1 U4.2 | length 68.9
  Top Layer w0.508: 53.85,43.25 54.6,42.5
  Top Layer w0.635: 53.85,43.25 C13.2@52.5,43.25 49.95,43.25 48,41.3 48,34.7 51,31.7 82.1,31.7 82.9,32.5 82.9,35 83.9,36 88.2,36 90,34.2 U4.2@90,33.5 90,33.812 90.492,34.304 91.504,34.304 93.819,36.619 93.819,37.869 R33.1@93.85,37.9 ; 54.6,42.4 54.6,42.5
VOUTN: P9.2 U3.5 | length 21.9
  Top Layer w0.635: v1(129.7,53.7) 131.492,53.7 131.495,53.703 U3.5@131.495,53.918
  Bottom Layer w0.635: v1(129.7,53.7) 129.7,46.3 P9.2@138.5,37.5
VOUTP: P9.1 U3.8 | length 16
  Top Layer w0.635: U3.8@135.305,53.918 136.582,53.918 v1(136.7,53.8)
  Bottom Layer w0.635: v1(136.7,53.8) 136.7,52.4 138.5,50.6 P9.1@138.5,40
pads on no net: J1.0 M1.9 R26.2 SW2.7 U3.9 U4.1 USB.0 USB.A8 USB.B8 USB_OTG.0 USB_OTG.A8 USB_OTG.B8 W.2 W.41 W.42 W.43 W.44 W.45 W.46 W.88
copper on no net:
  other v2: 42.5,32.5 137.5,32.5 42.5,117.5 137.5,117.5

## Polygon pours and split planes (outlines as drawn)
GND on Bottom Layer "NONET_L02_P001" (solid, shelved, pour order 1): 38,122.2 38.2,122 141.8,122 141.8,28.8 141.3,28.3 37.7,28.3

## Keep-outs
Keep-Out Layer:
  the board outline again, w0.254